# EAGLE board mdbt40 (EAGLE 6.6.0)
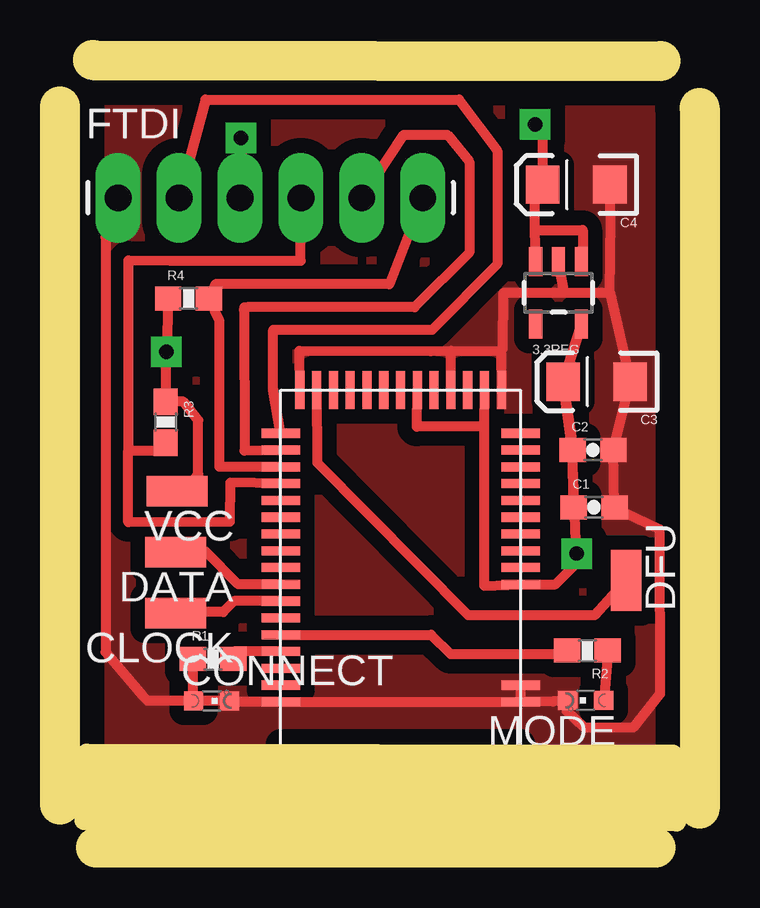
[diagram p0: board, top side]
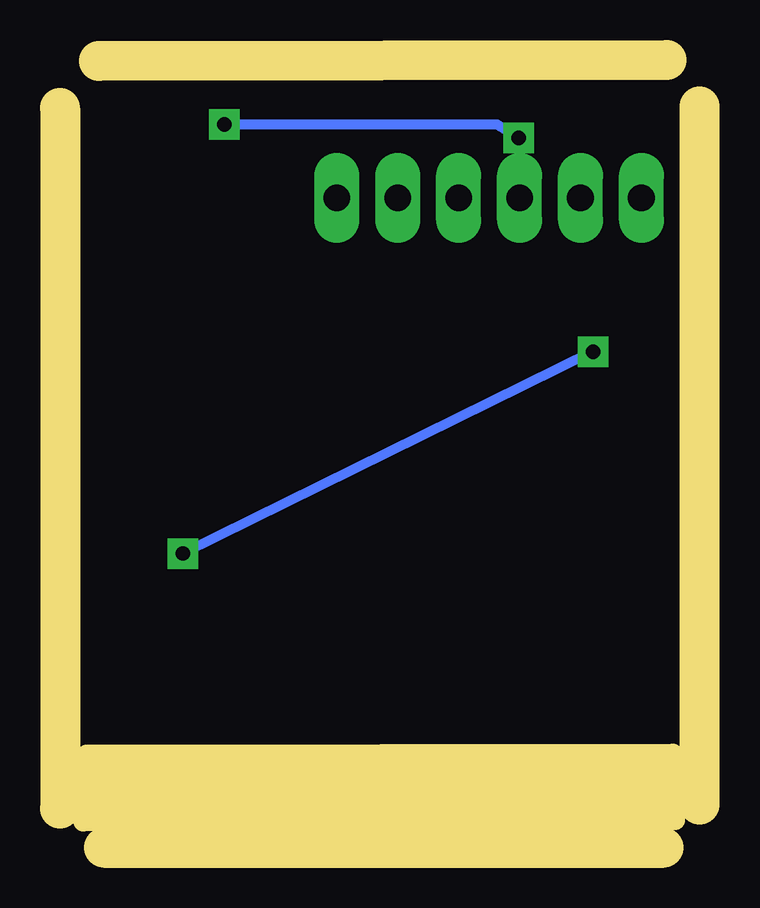
[diagram p1: board, bottom side, seen from below]

Size 26.67 x 32.84 mm. Coordinates in mm from the lower left corner, seen from the top.
Outline: 1.37,32.84 25.04,32.79
Outline: 26.67,30.84 26.67,1.63
Outline: 24.84,0 1.5,0
Outline: 0,1.8 0,30.91
Copper layers (1*16): Top 0.035mm / dielectric 1.5mm / Bottom 0.035mm
Design rules "default": minimum track width 10mil, minimum drill 24mil, track to track 8mil, track to pad 8mil, pad to pad 8mil, via to via 8mil, smd to smd 8mil, copper to edge 40mil, drill to drill 8mil, minimum pad ring 10mil, minimum via ring 8mil, stop-mask expansion 4mil, vias tented up to drill 0mil, thermal gap 10mil
Milling: 11 lines

## Footprints (pad centres in the part's own frame; a part is rotated, then mirrored left to right if it is on the bottom)
SOT23-5 = smd 0.55 x 1.2: 1 -0.95,-1.3; 2 0,-1.3; 3 0.95,-1.3; 4 0.95,1.3; 5 -0.95,1.3
0603-CAP = smd 1.1 x 1: 1 -0.85,0; 2 0.85,0
EIA3216 = smd 1.4 x 1.6: A 1.4,0; C -1.4,0
SMD1,27-2,54 = smd 1.27 x 2.54: 1 0,0
CHIPLED_0603 = smd 0.8 x 0.8: A 0,-0.75; C 0,0.75
1X06_LONGPADS = drill 1.118 pad 1.88 long: 1 0,0; 2 2.54,0; 3 5.08,0; 4 7.62,0; 5 10.16,0; 6 12.7,0
0603-RES = smd 1.1 x 1: 1 -0.85,0; 2 0.85,0
MDBT40 = smd 1.6 x 0.381: AVDD -5.08,0.48; DEC2 4.92,4.68; GND1 -5.08,5.38; GND2 -5.08,4.68; GND5 4.92,5.38; P0.08 4.92,-5.82; P0.09 4.92,-5.12; P0.10 4.92,-4.42; P0.11 4.92,-3.72; P0.12 4.92,-3.02; P0.13 4.92,-2.32; P0.14 4.92,-1.62; P0.15 4.92,-0.92; P0.16 4.92,-0.22; P0.17 4.92,1.88; P0.18 4.92,2.58; P0.19 4.92,3.28; P0.20 4.92,3.98; P0.21 -5.08,-0.22; P0.22 -5.08,-0.92; P0.23 -5.08,-1.62; P0.24 -5.08,-2.32; P0.25 -5.08,-3.02; P0.28 -5.08,-5.12; P0.29 -5.08,-5.82; SWCLK 4.92,1.18; SWDIO 4.92,0.48; XL1 -5.08,-4.42; XL2 -5.08,-3.72 | smd 0.381 x 1.6: DCC -2.88,-7.62; GND3 -4.28,-7.62; GND4 4.12,-7.62; P0.00 -1.48,-7.62; P0.01 -0.78,-7.62; P0.02 -0.08,-7.62; P0.03 0.62,-7.62; P0.04 1.32,-7.62; P0.05 2.02,-7.62; P0.06 2.72,-7.62; P0.07 3.42,-7.62; P0.30 -2.18,-7.62; VDD -3.58,-7.62

## Placement (x,y rotation side)
3.3REG  3.3V/150mA  [SOT23-5]  20.78,23.13 180 top
C1  [0603-CAP]  22.27,14.19 0 top
C2  [0603-CAP]  22.22,16.58 0 top
C3  [EIA3216]  22.38,19.43 180 top
C4  [EIA3216]  21.53,27.65 180 top
CLOCK  [SMD1,27-2,54]  4.83,9.78 90 top
CONNECT  [CHIPLED_0603]  6.32,6.12 270 top
DATA  [SMD1,27-2,54]  4.83,12.32 90 top
DFU  [SMD1,27-2,54]  23.6,11.15 180 top
FTDI  [1X06_LONGPADS]  2.43,27.1 0 top
MODE  [CHIPLED_0603]  21.92,6.14 90 top
R1  1k  [0603-RES]  6.38,7.87 0 top
R2  1k  [0603-RES]  21.99,8.22 180 top
R3  100k  [0603-RES]  4.41,17.74 270 top
R4  100k  [0603-RES]  5.36,22.9 0 top
U$1  MDBT40  [MDBT40]  14.12,11.46 180 top
VCC  [SMD1,27-2,54]  4.88,14.86 90 top

## Library data of the parts
3.3REG = SparkFun-PowerIC; PROD_ID: VREG-00822
C1 C2 = SparkFun-Passives
C3 C4 = SparkFun-Capacitors
CLOCK DATA DFU VCC = wirepad
CONNECT MODE = adafruit
FTDI = SparkFun-Connectors
R1-R4 = SparkFun-Resistors
U$1 = ITP_Lab

## Nets
CTS: FTDI.6 R4.2 U$1.P0.10
GND: 3.3REG.2 C1.2 C2.2 C3.C C4.C CONNECT.C FTDI.1 MODE.C U$1.GND1 U$1.GND2 U$1.GND3 U$1.GND4 U$1.GND5 U$1.P0.30
N$1: R1.2 U$1.P0.19
N$2: R2.2 U$1.P0.18
N$3: CONNECT.A R1.1
N$4: MODE.A R2.1
N$5: CLOCK.1 U$1.SWCLK
N$6: DATA.1 U$1.SWDIO
N$7: DFU.1 U$1.P0.07
N$8: FTDI.2 U$1.P0.08
RX: FTDI.4 R3.2 U$1.P0.11
TX: FTDI.5 U$1.P0.09
VCC: 3.3REG.5 C1.1 C2.1 C3.A R3.1 R4.1 U$1.AVDD U$1.P0.01 U$1.VDD VCC.1
VSS: 3.3REG.1 3.3REG.3 C4.A FTDI.3

## Tracks (layer width: path | path; a pad name or v marks a point on that pad's centre or on a via)
CTS
  Top 0.406: U$1.P0.10 6.66,15.87 6.66,21.97 R4.2 6.48,23.49 13.73,23.49 FTDI.6
GND
  Top 0.406: FTDI.1 1.91,25.45 1.91,8.15 3.45,6.32 3.66,6.12 CONNECT.C 7.12,6.08 U$1.GND5 U$1.GND1 | U$1.P0.30 16.31,20.57 16.32,20.72 | 16.32,20.72 18.39,20.7 | 18.39,20.7 U$1.GND3 | U$1.GND4 9.98,20.73 15.47,20.7 16.32,20.72 | U$1.GND2 U$1.GND1 | 18.39,20.7 18.47,20.8 18.49,23.14 21.03,23.14 | 21.03,23.14 3.3REG.2 | 21.03,23.14 22.94,23.14 | 22.94,23.14 C3.C C2.2 C1.2 24.99,13.28 25.02,6.4 23.93,5.03 21.84,5.03 21.12,5.71 MODE.C 20.56,6.09 U$1.GND1 | 22.94,23.14 22.96,26.19 C4.C
  pour Top (isolate 0.61, no thermals): 0.46,32.18 25.86,32.18 25.86,3.99 0.46,3.99
N$1
  Top 0.406: U$1.P0.19 7.23,8.18 R1.2
N$2
  Top 0.406: U$1.P0.18 15.48,8.88 16.28,8.08 20.72,8.08 R2.2
N$3
  Top 0.406: R1.1 5.53,6.16 CONNECT.A
N$4
  Top 0.406: R2.1 22.79,7.38 MODE.A
N$5
  Top 0.406: U$1.SWCLK 7.26,10.28 6.81,9.83 4.88,9.83 CLOCK.1
N$6
  Top 0.406: U$1.SWDIO 7.43,10.98 6.05,12.37 4.88,12.37 DATA.1
N$7
  Top 0.406: U$1.P0.07 10.72,16.05 17.02,9.7 22.3,9.7 DFU.1
N$8
  Top 0.406: U$1.P0.08 8.89,19.1 8.89,21.59 15.52,21.59 18.24,24.33 18.24,29.06 16.64,31.19 6.07,31.19 FTDI.2
RX
  Top 0.406: U$1.P0.11 7.1,15.22 7.08,13.58 2.85,13.56 2.85,16.56 | FTDI.4 10.03,24.46 4.6,24.46 2.85,24.49 2.85,16.56 | 2.85,16.56 4.08,16.56 R3.2
TX
  Top 0.406: FTDI.5 14.33,29.72 16.15,29.72 17.07,28.6 17.07,24.82 14.78,22.53 7.8,22.53 7.67,22.43 | 7.7,22.53 7.67,22.43 | 7.67,22.43 7.69,16.56 U$1.P0.09
VCC  (via drill 0.6 pad 1.27)
  Top 0.406: U$1.VDD 17.68,17.55 | 17.68,17.55 14.88,17.55 U$1.P0.01 | 17.68,17.55 17.68,10.92 U$1.AVDD 20.66,10.98 21.39,11.71 21.62,12.09 v21.54,12.27 21.34,17 C3.A | C1.1 C2.1 C3.A | R4.1 v4.45,20.68 R3.1 5.16,18.59 5.77,17.83 5.77,15.57 5.11,14.86 VCC.1 | 3.3REG.5 C3.A
  Bottom 0.406: v4.45,20.68 v21.54,12.27
VSS  (via drill 0.6 pad 1.27)
  Top 0.406: FTDI.3 7.7,27.94 v7.54,29.59 | 3.3REG.3 19.81,25.76 | 3.3REG.1 21.79,25.02 21.79,25.76 19.81,25.76 | 19.81,25.76 19.81,27.33 C4.A 20.13,29.84 v19.81,30.15
  Bottom 0.406: v7.54,29.59 8.43,30.15 v19.81,30.15